# Altium PCB Earphone-2.PcbDoc
Units mm, origin at the board's own origin, x right, y up, seen from the top; angles counter-clockwise.
Board outline 20.1 x 47.1 mm, 2 copper layers (Top Layer, Bottom Layer); 71 components, 47 nets, 221 pads, 24 vias.
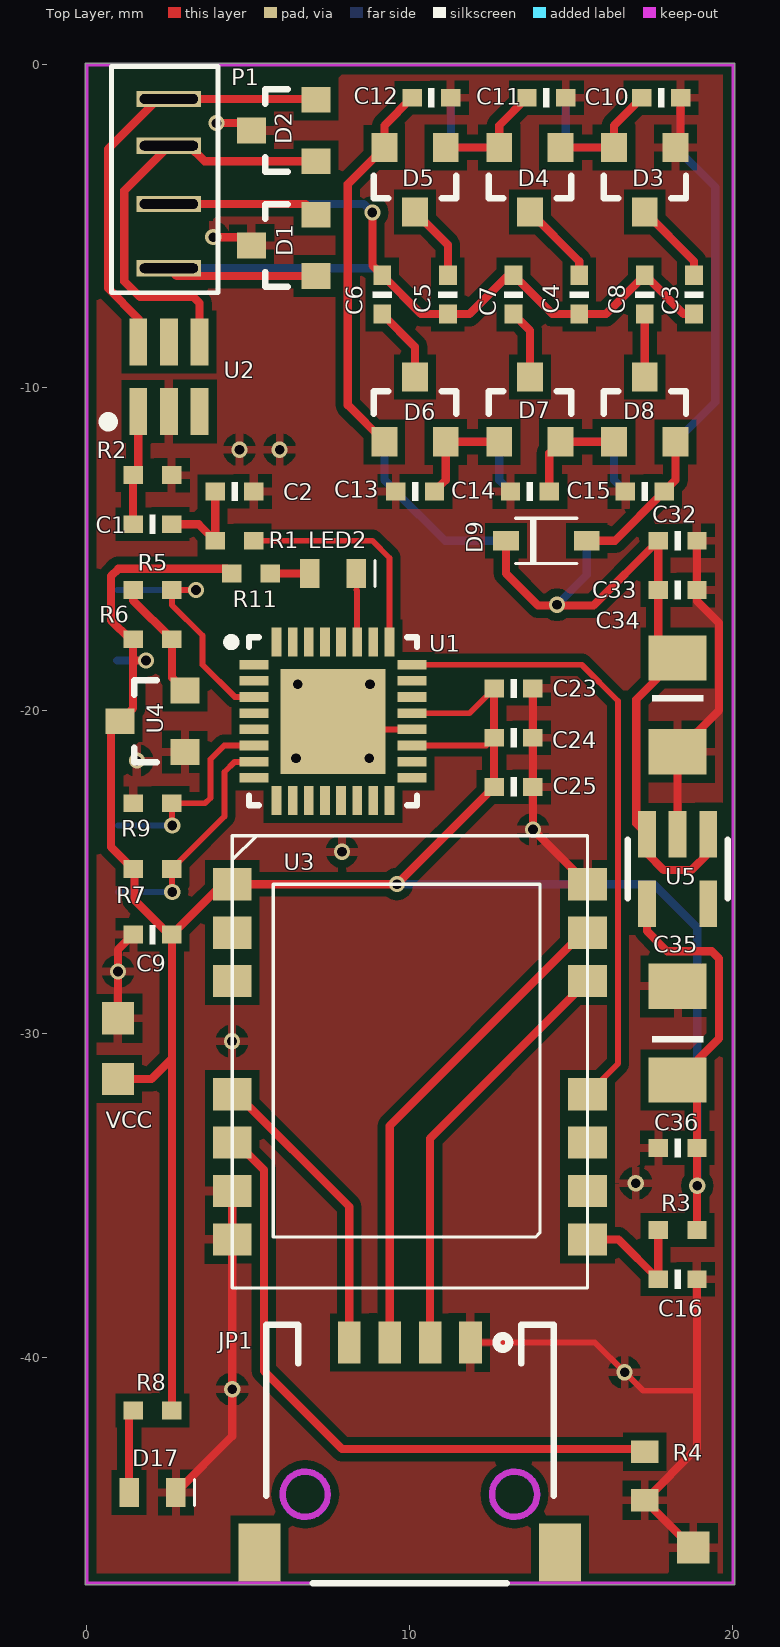
[diagram p0: Top Layer view]
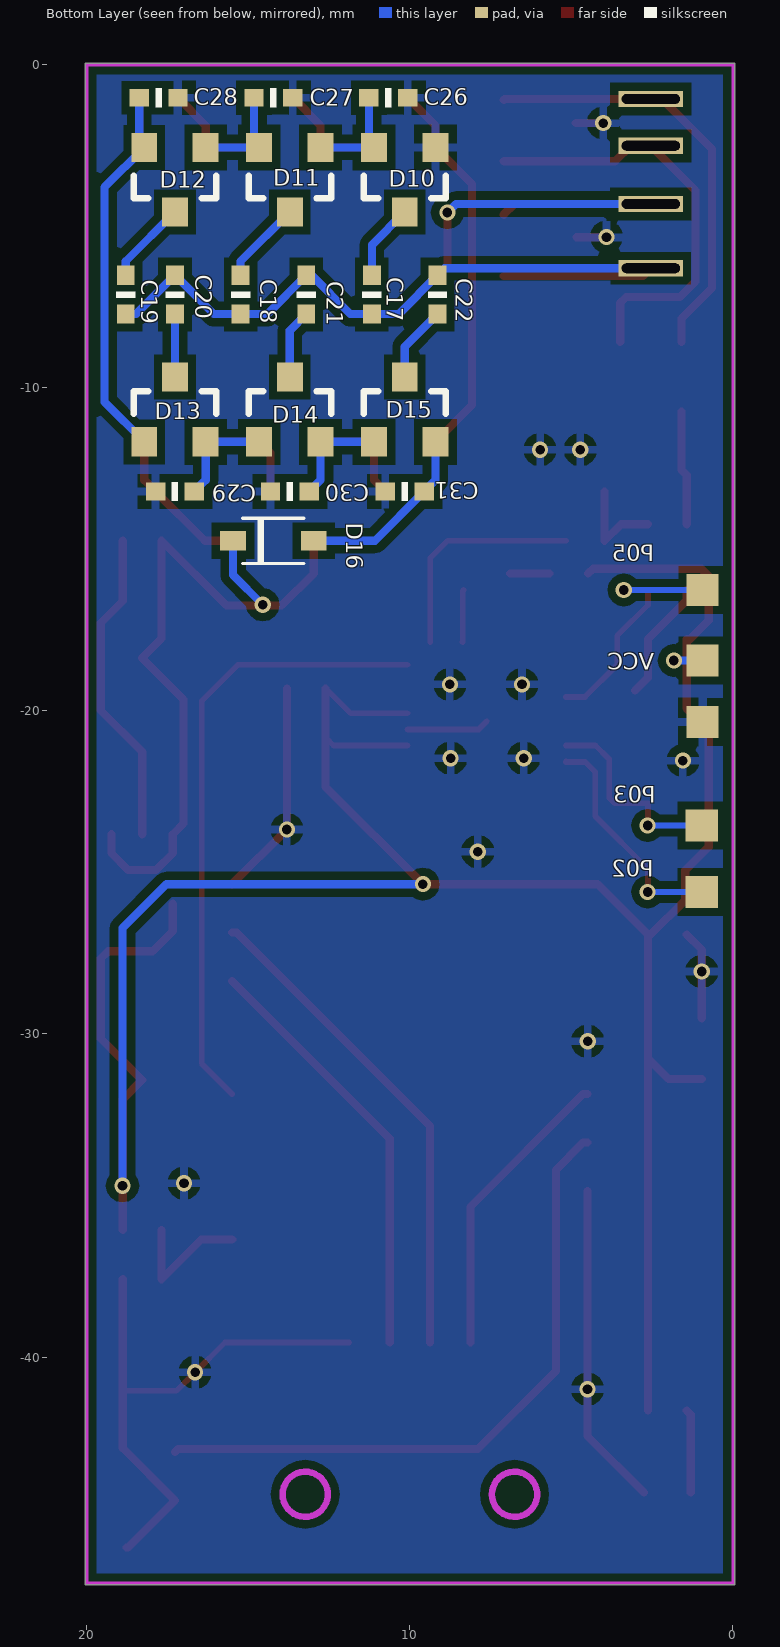
[diagram p1: Bottom Layer view, seen from below]
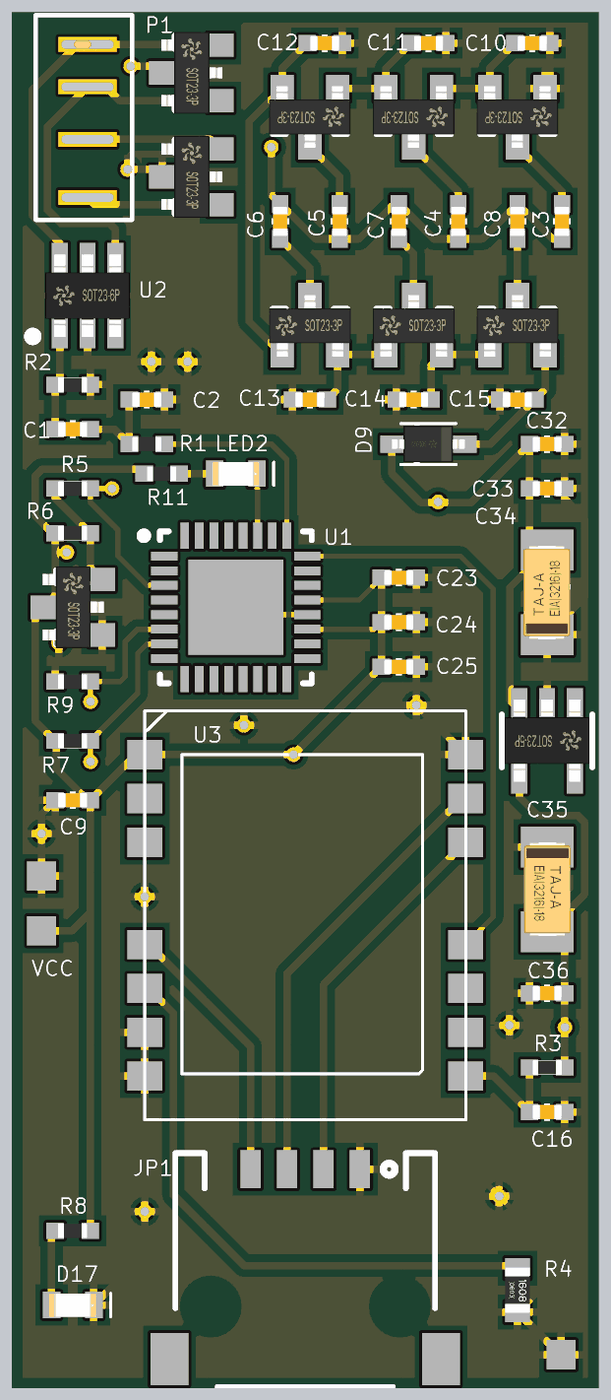
[diagram p2: 3D render of the assembled board from above, using the file's embedded part models]
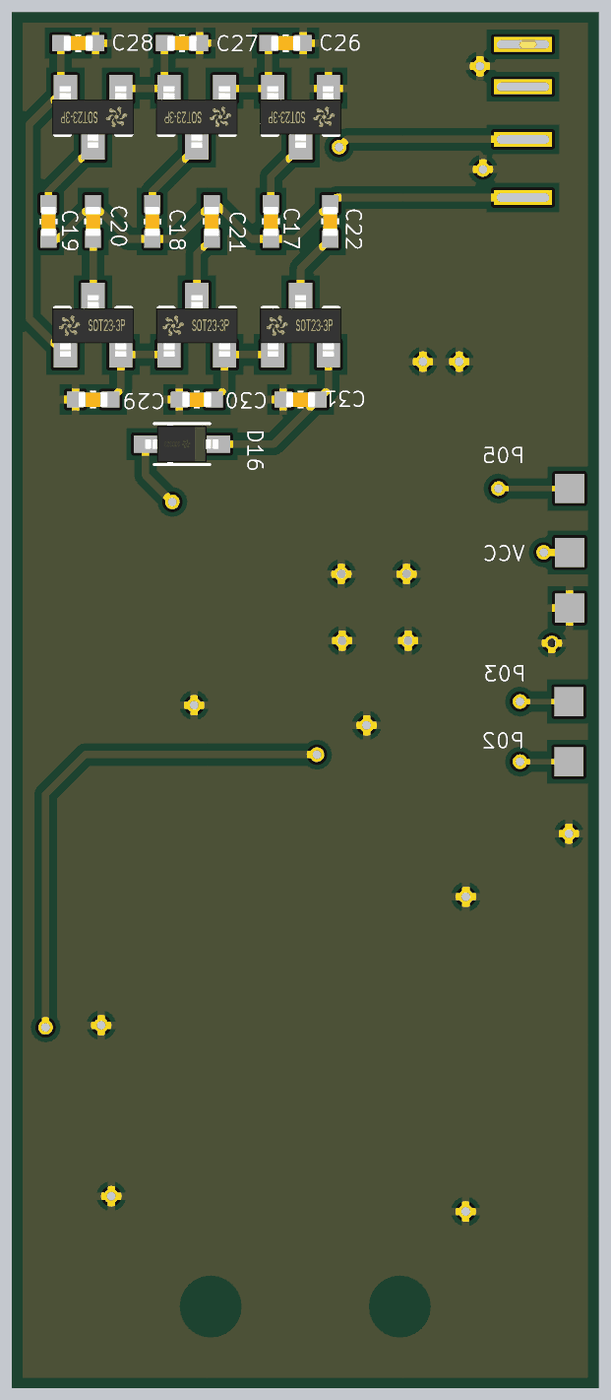
[diagram p3: 3D render of the assembled board from below, using the file's embedded part models]

## Layer stack, top to bottom
Top Layer: signal copper 0.0356
Dielectric: dielectric 0.32, FR-4, Dk 4.8
Bottom Layer: signal copper 0.0356

## Board outline
-0.05,-47.05 20.05,-47.05 20.05,0.05 -0.05,0.05

## Design rules (kind name [scope] priority, off if disabled: settings)
Clearance [All] p1: gap=0.254
HoleToHoleClearance [All] p1: gap=0.2 allowstackedmicrovias=TRUE
MinimumSolderMaskSliver [All] p1: minsoldermaskwidth=0.1
PolygonConnect [All] p1: connectstyle=Relief reliefconductorwidth=0.254 reliefentries=4 polygonreliefangle="90 Angle"
RoutingVias [All] p1: holewidth=0.711 width=1.27 viastyle="Through Hole" minholewidth=0.1 minwidth=0.1 maxholewidth=0.711 maxwidth=1.27
SilkToSilkClearance [All] p1: silktosilkclearance=0.1
SilkscreenOverComponentPads [All] p1: minsilkscreentomaskgap=0.1
SolderMaskExpansion [All] p1: expansion=0.102
TestPointUsage [All] p1: valid=0 allowmultiple=FALSE
Testpoint [All] p1: side=15 testpointundercomponent=TRUE minsize=1.016 maxsize=2.54 preferedsize=1.524 minholesize=0 maxholesize=1.016 preferedholesize=0.813 testpointgrid=0.025 style=1023 order=0123456789
Width [All] p1: maxlimit=0.254 minlimit=0.1 preferedwidth=0.254 minimp=50.000000 maximp=50.000000 favimp=50.000000
20 further rules are at their usual default settings.

## Components (designator, comment, footprint, x,y, rotation, side; value= is the part's Value field where it differs from the comment)
C1 "2.2uF" 0402C 2.032,-14.224 r0 top
C2 "47pF" 0402C 4.572,-13.208 r180 top
C3 "10uF" 0402C 18.796,-7.112 r270 top
C4 "10uF" 0402C 15.24,-7.112 r270 top
C5 "10uF" 0402C 11.176,-7.112 r270 top
C6 "10uF" 0402C 9.144,-7.112 r90 top
C7 "10uF" 0402C 13.208,-7.112 r90 top
C8 "10uF" 0402C 17.272,-7.112 r90 top
C9 "10uF" 0402C 2.032,-26.924 r180 top
C10 "10uF" 0402C 17.78,-1.016 r180 top
C11 "10uF" 0402C 14.224,-1.016 r180 top
C12 "10uF" 0402C 10.668,-1.016 r180 top
C13 "10uF" 0402C 10.16,-13.208 r0 top
C14 "10uF" 0402C 13.716,-13.208 r0 top
C15 "10uF" 0402C 17.272,-13.208 r0 top
C16 "1uF" 0402C 18.288,-37.592 r180 top
C17 "10uF" 0402C 11.176,-7.112 r270 bottom
C18 "10uF" 0402C 15.24,-7.112 r270 bottom
C19 "10uF" 0402C 18.796,-7.112 r270 bottom
C20 "10uF" 0402C 17.272,-7.112 r90 bottom
C21 "10uF" 0402C 13.208,-7.112 r90 bottom
C22 "10uF" 0402C 9.144,-7.112 r90 bottom
C23 "0.01uF" 0402C 13.208,-19.304 r180 top
C24 "0.01uF" 0402C 13.208,-20.828 r180 top
C25 "0.01uF" 0402C 13.208,-22.352 r180 top
C26 "10uF" 0402C 10.668,-1.016 r0 bottom
C27 "10uF" 0402C 14.224,-1.016 r0 bottom
C28 "10uF" 0402C 17.78,-1.016 r0 bottom
C29 "10uF" 0402C 17.272,-13.208 r180 bottom
C30 "10uF" 0402C 13.716,-13.208 r180 bottom
C31 "10uF" 0402C 10.16,-13.208 r180 bottom
C32 "1uF" 0402C 18.288,-14.732 r180 top
C33 "10uF" 0402C 18.288,-16.256 r180 top
C34 "CP6032-100uF" T3216-18[A] 18.288,-19.812 r270 top
C35 "CP6032-100uF" T3216-18[A] 18.288,-29.972 r90 top
C36 "10uF" 0402C 18.288,-33.528 r0 top
D1 "PESD5V2S2UT" SOT23 6.096,-5.588 r90 top
D2 "PESD5V2S2UT" SOT23 6.096,-2.032 r90 top
D3 "BAT721S" SOT23 17.272,-3.556 r180 top
D4 "BAT721S" SOT23 13.716,-3.556 r180 top
D5 "BAT721S" SOT23 10.16,-3.556 r180 top
D6 "BAT721S" SOT23 10.16,-10.668 r0 top
D7 "BAT721S" SOT23 13.716,-10.668 r0 top
D8 "BAT721S" SOT23 17.272,-10.668 r0 top
D9 "PMEG4002EJ" SOD323 14.224,-14.732 r0 top
D10 "BAT721S" SOT23 10.16,-3.556 r0 bottom
D11 "BAT721S" SOT23 13.716,-3.556 r0 bottom
D12 "BAT721S" SOT23 17.272,-3.556 r0 bottom
D13 "BAT721S" SOT23 17.272,-10.668 r180 bottom
D14 "BAT721S" SOT23 13.716,-10.668 r180 bottom
D15 "BAT721S" SOT23 10.16,-10.668 r180 bottom
D16 "PMEG4002EJ" SOD323 14.224,-14.732 r180 bottom
D17 "LED" 0603L 2.032,-44.196 r0 top
JP1 "TEST_PAPER" TEST_PAPER 10,-42.8 r0 top
LED2 "LED" 0603L 7.62,-15.748 r0 top
P1 "EarPhone" EARPHONE 2.54,-3.556 r0 top
R1 "1K" 0402R 4.572,-14.732 r180 top
R2 "1K" 0402R 2.032,-12.7 r0 top
R3 "10K" 0402R 18.288,-36.068 r0 top
R4 "NTC" 0603R 17.272,-43.688 r90 top
R5 "10K" 0402R 2.032,-16.256 r180 top
R6 "100K" 0402R 2.032,-17.78 r180 top
R7 "10K" 0402R 2.032,-24.892 r0 top
R8 "10K" 0402R 2.032,-41.656 r180 top
R9 "10K" 0402R 2.032,-22.86 r180 top
R11 "4.7K" 0402R 5.08,-15.748 r0 top
U1 "LPC822M101JHI33" QFN50P500X500X100-33N 7.62,-20.32 r0 top
U2 "ASC0201" SOT23-6 2.54,-9.652 r0 top
U3 "RB1402" RB1402 10,-30.862 r0 top
U4 "MAX809" SOT23 2.032,-20.32 r90 top
U5 "MIC5231" SOT23-5 18.288,-24.892 r180 top

## Footprints (in the part's own frame and the unit in brackets; to place one, negate y for a bottom-side part, rotate by r counter-clockwise, add the part's x,y. Pads: shape width x height; smd on the part's side, far side on the other; paste and mask are expansions set on the pad)
0402C [mm]
  rect 0.6x0.55 smd: 1(-0.6,0) 2(0.6,0)
  silkscreen extent -0.1,-0.3 0.1,0.3, body extent -0.5,-0.25 0.5,0.25, height 0.5
0402R [mm]
  rect 0.6x0.55 smd: 1(-0.6,0) 2(0.6,0)
  body extent -0.5,-0.25 0.5,0.25, height 0.35
0603L [mm]
  rect 0.6x0.9 smd: 1(-0.725,0) 2(0.725,0)
  silkscreen extent 1.3,-0.4 1.3,0.4, body extent -0.8,-0.41 0.8,0.39, height 0.6
0603R [mm]
  rect 0.7x0.85 smd: 1(-0.75,0) 2(0.75,0)
  body extent -0.77,-0.43 0.77,0.43, height 0.46
EARPHONE [mm]
  rect 2x0.5 hole 0.3 slot 1.8 at 0 deg: 1(0,-2.74) 2(0,-0.75) 3(0,1.05) 4(0,2.5)
  silkscreen extent -1.78,-3.5 1.52,3.5
QFN50P500X500X100-33N [mm]
  rect 0.9x0.3 smd: 1(-2.45,1.75) 2(-2.45,1.25) 3(-2.45,0.75) 4(-2.45,0.25) 5(-2.45,-0.25) 6(-2.45,-0.75) 7(-2.45,-1.25) 8(-2.45,-1.75) 17(2.45,-1.75) 18(2.45,-1.25) 19(2.45,-0.75) 20(2.45,-0.25) 21(2.45,0.25) 22(2.45,0.75) 23(2.45,1.25) 24(2.45,1.75)
  rect 0.3x0.9 smd: 9(-1.75,-2.45) 10(-1.25,-2.45) 11(-0.75,-2.45) 12(-0.25,-2.45) 13(0.25,-2.45) 14(0.75,-2.45) 15(1.25,-2.45) 16(1.75,-2.45) 25(1.75,2.45) 26(1.25,2.45) 27(0.75,2.45) 28(0.25,2.45) 29(-0.25,2.45) 30(-0.75,2.45) 31(-1.25,2.45) 32(-1.75,2.45)
  rect 3.25x3.25 smd: 33(0,0)
  silkscreen extent -3.27,-2.6 2.6,2.6
RB1402 [mm]
  rect 1.2x1 smd: 1(-5.5,5.5) 2(-5.5,4) 3(-5.5,2.5) 4(-5.5,-1) 5(-5.5,-2.5) 6(-5.5,-4) 7(-5.5,-5.5) 8(5.5,-5.5) 9(5.5,-4) 10(5.5,-2.5) 11(5.5,-1) 12(5.5,2.5) 13(5.5,4) 14(5.5,5.5)
  silkscreen extent -5.5,-7 5.5,7
SOD323 [mm]
  rect 0.8x0.6 smd: 1(-1.25,0) 2(1.25,0)
  silkscreen extent -0.95,-0.7 0.95,0.7, body extent -1.26,-0.63 1.24,0.63, height 1.1
SOT23 [mm]
  rect 0.8x0.9 smd: 1(-0.95,-1) 2(0.95,-1) 3(0,1)
  silkscreen extent -1.28,-0.13 1.28,0.57, body extent -1.4,-1.07 1.4,1.03, height 0.9
SOT23-5 [mm]
  rect 0.55x1.45 smd: 1(-0.95,-1.075) 2(0,-1.075) 3(0.95,-1.075) 4(0.95,1.075) 5(-0.95,1.075)
  silkscreen extent -1.55,-0.9 1.55,0.9, body extent -1.45,-1.42 1.45,1.4, height 1.1
SOT23-6 [mm]
  rect 0.55x1.45 smd: 1(-0.95,-1.075) 2(0,-1.075) 3(0.95,-1.075) 4(0.95,1.075) 5(0,1.075) 6(-0.95,1.075)
  silkscreen extent -1.98,-1.5 -1.78,-1.3, body extent -1.45,-1.41 1.45,1.41, height 1.05
T3216-18[A] [mm]
  rect 1.4x1.8 smd: 1(-1.45,0) 2(1.45,0)
  silkscreen extent -0.3,-0.8 -0.1,0.8, body extent -1.6,-0.81 1.6,0.79, height 1.62
TEST_PAPER [mm]
  rect 1.3x1.8 smd: 0(-4.65,-3.25) 0(4.65,-3.25)
  rect 0.7x1.3 smd: 1(1.875,3.25) 2(0.625,3.25) 3(-0.625,3.25) 4(-1.875,3.25)
  Keep-Out Layer circle w0.2: c3.24,-1.45 r0.7
  Keep-Out Layer circle w0.2: c-3.24,-1.45 r0.7
  silkscreen extent -4.45,-4.2 4.45,3.8

## Part data
C1 C2 C3 C4 C5 C6 C7 C8 C9 C10 C11 C12 C13 C14 C15 C16 C17 C18 C19 C20 C21 C22 C23 C24 C25 C26 C27 C28 C29 C30 C31 C32 C33 C36: library part CAP
C34 C35: library part "CAP POL2"
D1 D2 D3 D4 D5 D6 D7 D8 D10 D11 D12 D13 D14 D15 U4: "SOT23"
D9 D16: "SOD323F"
R1 R2 R3 R4 R5 R6 R7 R8 R9 R11: library part RES
U2: "SOT23-6"

## Free pads (board coordinates)
  rect 1x1 smd far side: 1(0.94,-20.345) 1(0.94,-18.44) 1(0.94,-16.256) 1(0.965,-25.603) 1(0.965,-23.546)
  rect 1x1 smd: 1(0.965,-31.394) 1(0.965,-29.515) 1(18.771,-45.898)

## Via types
v1: diameter 0.5, hole 0.3, Top Layer to Bottom Layer, 24 vias

## Nets (pads, with @x,y where several pads share a name; then routed paths per layer and width w, separated by ;. In a path a pad name is that pad's centre, name@x,y a point inside that pad or via, vN(x,y) a via of type N, cw(c..) or ccw(c..) an arc to the next point about the centre after c; other vN are vias at no path point)
AINO: JP1.4 U3.4 | length 9.3
  Top Layer w0.254: U3.4 4.639,-31.862 8.125,-35.348 JP1.4
G/M: D2.2 P1.4 U2.6 | length 13.5
  Top Layer w0.254: U2.6 1.59,-7.853 0.651,-6.914 0.651,-2.606 2.201,-1.056 P1.4 7.07,-1.056 D2.2
GND: C2.1 C9.2 C10.1 C11.1 C12.1 C13.1 C14.1 C15.1 C16.1 C23.1 C24.1 C25.1 C26.1 C27.1 C28.1 C29.1 C30.1 C31.1 C32.1 C33.1 C34.2 C35.2 C36.1 D1.3 D2.3 D3.1 D10.1 D17.2 JP1.1 pad.1@0.94,-20.345 pad.1@0.965,-29.515 pad.1@18.771,-45.898 R2.2 R4.1 R9.2 U1.20 U1.33 U2.2 U3.6 U3.7 U3.14 U4.1 U5.2 | length 52.7
  Top Layer w0.18: U1.33 7.87,-20.57 U1.20 ; JP1.1 15.725,-39.55 v1(16.647,-40.472) 17.221,-41.046 18.888,-41.046
  Top Layer w0.254: pad.1@0.965,-29.515 0.965,-27.391 C9.2 ; D17.2 4.5,-42.453 v1(4.5,-40.996) U3.7 U3.6 ; v1(3.912,-5.334) D1.3@4.842,-5.334 ; v1(4.013,-1.803) D2.3@4.867,-1.803 ; C23.1 C24.1 C25.1 v1(13.808,-23.67) U3.14 ; D3.1 18.38,-2.398 C10.1 ; U5.2 C34.2 19.569,-19.981 19.569,-17.281 18.888,-16.6 C33.1 C32.1 ; pad.1@18.771,-45.898 18.732,-45.898 R4.1 18.888,-42.822 18.888,-41.046 C16.1
  other v1: 16.993,-34.62 4.496,-30.226 0.965,-28.067 7.899,-24.359 1.549,-21.539 6.477,-21.463 8.738,-21.463 6.528,-19.177 8.763,-19.177 4.724,-11.913 5.969,-11.913
L-CH: C17.2 C18.2 C19.2 C20.2 C21.2 C22.2 D1.1 P1.1 | length 23.5
  Top Layer w0.254: P1.1 2.782,-6.538 D1.1
  Bottom Layer w0.254: P1.1 8.928,-6.296 C22.2 10.344,-7.712 C17.2 11.846,-7.712 13.046,-6.512 C21.2 14.408,-7.712 C18.2 16.072,-7.712 C20.2 18.472,-7.712 C19.2
LED2: LED2.2 U1.27 | length 1.6
  Top Layer w0.18: 8.345,-16.256 8.364,-16.275 8.364,-17.864 U1.27
M/G: D2.1 P1.3 U2.4 | length 13.3
  Top Layer w0.254: U2.4 3.49,-7.376 3.302,-7.188 1.643,-7.188 1.159,-6.704 1.159,-3.887 P1.3 3.166,-2.506 3.642,-2.982 D2.1
MIC: C1.1 R2.1 U2.1 | length 3.6
  Top Layer w0.254: C1.1 R2.1 1.59,-12.542 U2.1
NetC1_2: C1.2 C2.2 R1.2 | length 3.1
  Top Layer w0.254: C1.2 3.464,-14.224 R1.2 C2.2
NetC3_1: C3.1 D3.3 | length 2.6
  Top Layer w0.254: D3.3 18.796,-6.08 C3.1
NetC4_1: C4.1 D4.3 | length 2.6
  Top Layer w0.254: D4.3 15.24,-6.08 C4.1
NetC5_1: C5.1 D5.3 | length 2.4
  Top Layer w0.254: D5.3 11.176,-5.572 C5.1
NetC6_1: C6.1 D6.3 | length 2.4
  Top Layer w0.254: C6.1 10.16,-8.728 D6.3
NetC7_1: C7.1 D7.3 | length 2.2
  Top Layer w0.254: C7.1 13.716,-8.22 D7.3
NetC8_1: C8.1 D8.3 | length 2
  Top Layer w0.254: D8.3 C8.1
NetC10_2: C10.2 D3.2 D4.1 | length 3.6
  Top Layer w0.254: D4.1 D3.2 16.322,-1.874 C10.2
NetC11_2: C11.2 D4.2 D5.1 | length 3.6
  Top Layer w0.254: D5.1 D4.2 12.766,-1.874 C11.2
NetC12_2: C12.2 D5.2 D6.1 | length 11.9
  Top Layer w0.254: D6.1 8.077,-10.535 8.077,-3.689 D5.2 9.21,-1.874 C12.2
NetC13_2: C13.2 D6.2 D7.1 | length 3.3
  Top Layer w0.254: C13.2 11.11,-12.858 D6.2 D7.1
NetC14_2: C14.2 D7.2 D8.1 | length 3.3
  Top Layer w0.254: C14.2 14.316,-12.018 D7.2 D8.1
NetC15_2: C15.2 D8.2 D9.2 | length 4.7
  Top Layer w0.254: D9.2 16.348,-14.732 C15.2 18.222,-12.858 D8.2
NetC16_2: C16.2 R3.1 U3.8 | length 4.2
  Top Layer w0.254: U3.8 16.458,-36.362 C16.2 R3.1
NetC17_1: C17.1 D10.3 | length 2.4
  Bottom Layer w0.254: D10.3 11.176,-5.572 C17.1
NetC18_1: C18.1 D11.3 | length 2.6
  Bottom Layer w0.254: D11.3 15.24,-6.08 C18.1
NetC19_1: C19.1 D12.3 | length 2.6
  Bottom Layer w0.254: D12.3 18.796,-6.08 C19.1
NetC20_1: C20.1 D13.3 | length 2
  Bottom Layer w0.254: D13.3 C20.1
NetC21_1: C21.1 D14.3 | length 2.2
  Bottom Layer w0.254: C21.1 13.716,-8.22 D14.3
NetC22_1: C22.1 D15.3 | length 2.4
  Bottom Layer w0.254: C22.1 10.16,-8.728 D15.3
NetC26_2: C26.2 D10.2 D11.1 | length 3.3
  Bottom Layer w0.254: C26.2 11.268,-2.398 D10.2 D11.1
NetC27_2: C27.2 D11.2 D12.1 | length 3.3
  Bottom Layer w0.254: C27.2 14.824,-2.398 D11.2 D12.1
NetC28_2: C28.2 D12.2 D13.1 | length 11.7
  Bottom Layer w0.254: D13.1 19.452,-10.438 19.452,-3.786 D12.2 18.38,-2.398 C28.2
NetC29_2: C29.2 D13.2 D14.1 | length 3.3
  Bottom Layer w0.254: D14.1 D13.2 16.322,-12.858 C29.2
NetC30_2: C30.2 D14.2 D15.1 | length 3.3
  Bottom Layer w0.254: D15.1 D14.2 12.766,-12.858 C30.2
NetC31_2: C31.2 D15.2 D16.2 | length 5.7
  Bottom Layer w0.254: D15.2 9.21,-12.858 C31.2 11.084,-14.732 D16.2
NetD17_1: D17.1 R8.2 | length 2.6
  Top Layer w0.254: D17.1 1.307,-41.781 R8.2
NetLED2_1: LED2.1 R11.2 | length 1.2
  Top Layer w0.254: R11.2 LED2.1
NetR5_2: R5.2 R6.1 U4.2 | length 3.8
  Top Layer w0.254: R5.2 1.432,-16.58 R6.1 2.632,-18.97 U4.2
NTC: R4.2 U3.5 | length 20.4
  Top Layer w0.254: U3.5 4.639,-33.362 5.481,-34.204 5.481,-40.431 7.899,-42.85 17.184,-42.85 R4.2
P02: pad.1@0.965,-25.603 R7.2 U1.7 | length 7.1
  Top Layer w0.18: v1@2.632,-25.594 R7.2 4.26,-23.264 4.26,-21.894 4.578,-21.576 5.164,-21.576 U1.7
  Bottom Layer w0.18: pad.1@0.965,-25.603 v1(2.642,-25.603)
P03: pad.1@0.965,-23.546 R9.1 U1.6 | length 6.3
  Top Layer w0.18: v1@2.632,-23.536 R9.1 3.658,-22.86 3.826,-22.692 3.826,-21.498 4.254,-21.07 U1.6
  Bottom Layer w0.18: pad.1@0.965,-23.546 v1(2.642,-23.546)
P05: pad.1@0.94,-16.256 R5.1 U1.3 | length 7.9
  Top Layer w0.18: v1(3.378,-16.256) R5.1 2.632,-16.719 3.581,-17.668 3.581,-18.568 4.578,-19.564 5.164,-19.564 U1.3
  Bottom Layer w0.18: pad.1@0.94,-16.256 v1(3.378,-16.256)
P14: R1.1 U1.25 | length 7
  Top Layer w0.18: R1.1 8.839,-14.732 9.37,-15.263 U1.25
PT15: JP1.2 U3.12 | length 13.2
  Top Layer w0.254: JP1.2 10.625,-33.237 U3.12
PT16: JP1.3 U3.13 | length 15.3
  Top Layer w0.254: JP1.3 9.375,-32.848 15.361,-26.862 U3.13
R-CH: C3.2 C4.2 C5.2 C6.2 C7.2 C8.2 D1.2 P1.2 | length 25.3
  Top Layer w0.254: P1.2 6.764,-4.306 D1.2 ; v1(8.839,-4.572) 8.839,-6.207 C6.2 10.344,-7.712 C5.2 11.846,-7.712 13.046,-6.512 C7.2 14.408,-7.712 16.072,-7.712 C8.2 18.472,-7.712 C3.2
  Bottom Layer w0.254: P1.2 8.573,-4.306 v1(8.839,-4.572)
RXD: U1.24 U3.11 | length 19.4
  Top Layer w0.18: U1.24 15.319,-18.57 16.444,-19.695 16.444,-30.918 U3.11
VCC: C9.1 C23.2 C24.2 C25.2 C35.1 C36.2 pad.1@0.94,-18.44 pad.1@0.965,-31.394 R3.2 R6.2 R7.1 R8.1 R11.1 U1.19 U1.21 U3.1 U4.3 U5.4 | length 85.2
  Top Layer w0.18: U1.19 12.366,-21.07 C24.2 ; U1.21 11.842,-20.07 C23.2
  Top Layer w0.254: pad.1@0.965,-31.394 1.997,-31.394 2.632,-30.759 ; v1(1.829,-18.44) 1.432,-18.44 ; R8.1 2.632,-30.759 ; R11.1 4.332,-15.6 0.974,-15.6 0.751,-15.823 0.751,-17.197 1.334,-17.78 R6.2 1.432,-18.44 ; C23.2 C24.2 C25.2 v1(9.598,-25.362) U3.1 4.194,-25.362 C9.1 ; U5.4 17.338,-26.812 17.967,-27.441 19.346,-27.441 19.569,-27.664 19.569,-30.141 C35.1 18.888,-32.022 C36.2 R3.2 ; 1.432,-18.44 1.432,-19.92 U4.3 0.751,-20.601 0.751,-24.211 R7.1 1.473,-24.933 1.473,-25.851 2.546,-26.924 C9.1 ; 2.632,-30.759 C9.1
  Bottom Layer w0.254: pad.1@0.94,-18.44 v1(1.829,-18.44) ; v1(9.598,-25.362) 17.539,-25.362 18.898,-26.721 v1(18.898,-34.696)
VL-IN: C32.2 C33.2 C34.1 D9.1 D16.1 U5.1 U5.3 | length 22.8
  Top Layer w0.254: D9.1 12.974,-15.743 13.97,-16.739 15.681,-16.739 C32.2 C33.2 17.688,-17.762 C34.1 17.007,-19.643 17.007,-23.486 U5.3 17.338,-24.406 17.855,-24.923 18.721,-24.923 19.238,-24.406 U5.1
  Bottom Layer w0.254: v1(14.554,-16.713) 15.474,-15.793 D16.1
pads on no net: JP1.0 U1.1 U1.2 U1.4 U1.5 U1.8 U1.9 U1.10 U1.11 U1.12 U1.13 U1.14 U1.15 U1.16 U1.17 U1.18 U1.22 U1.23 U1.26 U1.28 U1.29 U1.30 U1.31 U1.32 U2.3 U2.5 U3.2 U3.3 U3.9 U3.10 U5.5

## Polygon pours and split planes (outlines as drawn)
GND on Top Layer "Top Layer-No Net" (solid, remove dead copper, pour order 1000): 0,0 20,0 20,-47 0,-47
GND on Bottom Layer "Top Layer-No Net" (solid, remove dead copper, pour order 1001): 0,-47 0,0 20,0 20,-47

## Keep-outs
Keep-Out Layer:
  lines w0.1: 0,-47 20,-47 20,0 0,0 0,-47

## Silkscreen, mask and mechanical layers (free items; w line width, h text height)
Top Overlay:
  text "VCC" at 0.584,-32.918 h0.51
Bottom Overlay:
  text "P05" at 2.438,-15.367 h0.51
  text "VCC" at 2.438,-18.72 h0.51
  text "P03" at 2.388,-22.835 h0.51
  text "P02" at 2.445,-25.128 h0.51

## Text inside footprints (layer, text, board x,y; h text height)
C34: Mechanical 15 "-" at 17.907,-20.701 h1.5 r270; Mechanical 15 "+" at 17.78,-18.415 h1.5 r270
C35: Mechanical 15 "+" at 18.796,-31.369 h1.5 r90; Mechanical 15 "-" at 18.669,-29.083 h1.5 r90
U1: Mechanical 15 "1" at 7.456,-20.77 h0.51